# EAGLE board box (EAGLE 8.3.1)
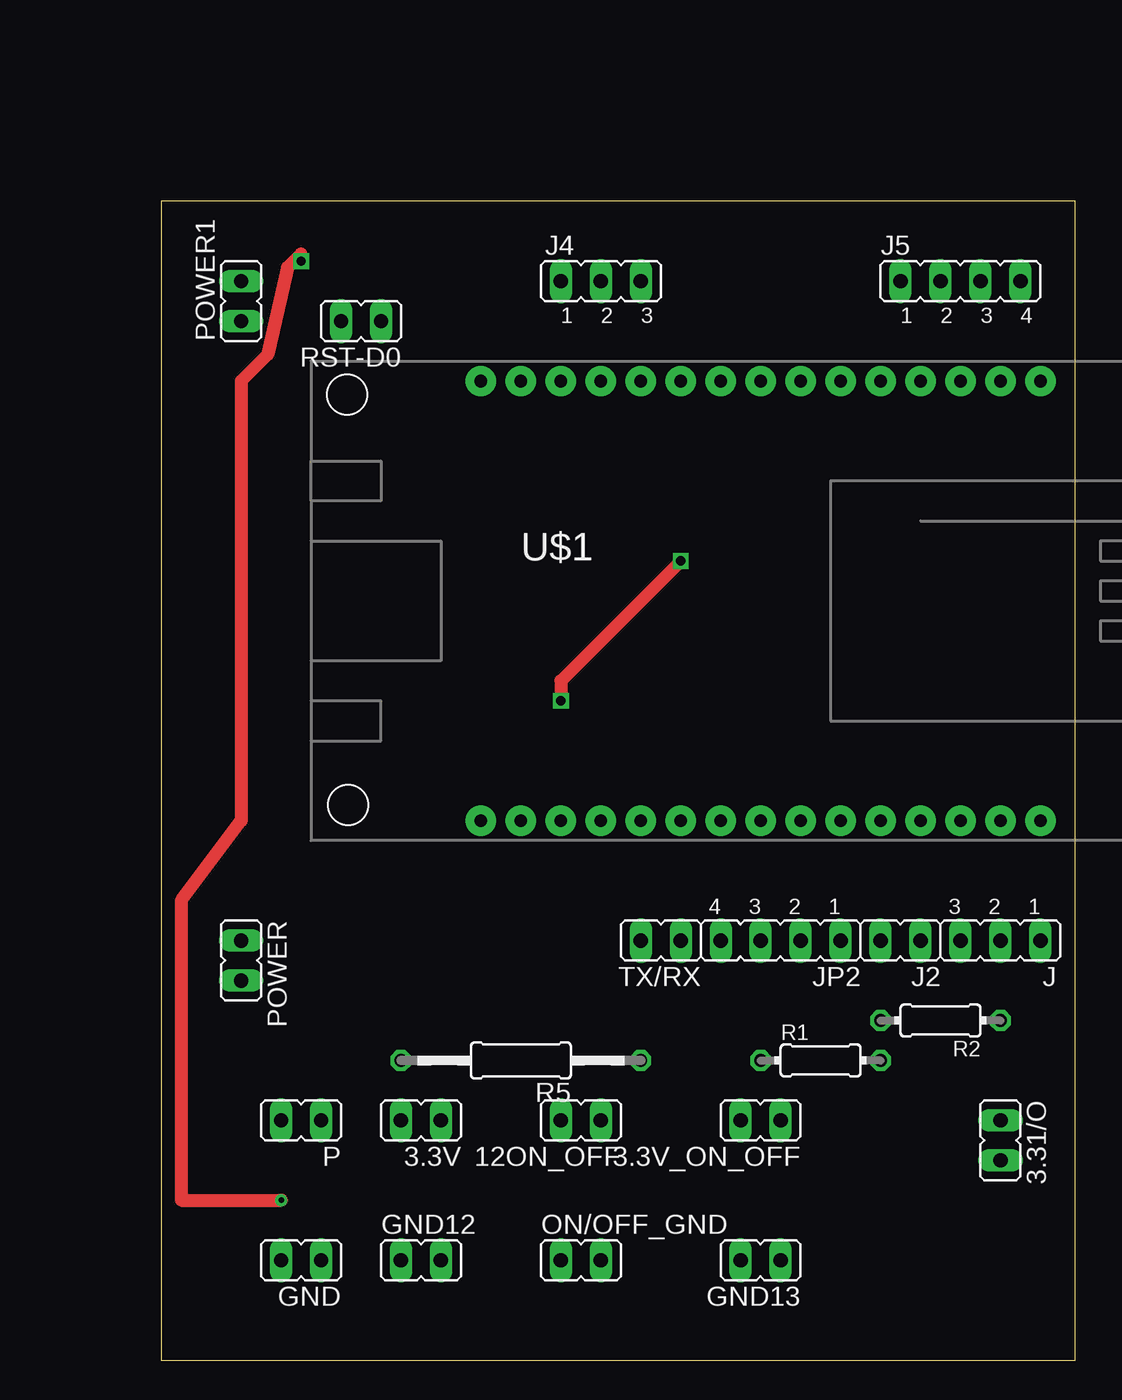
[diagram p0: board, top side]
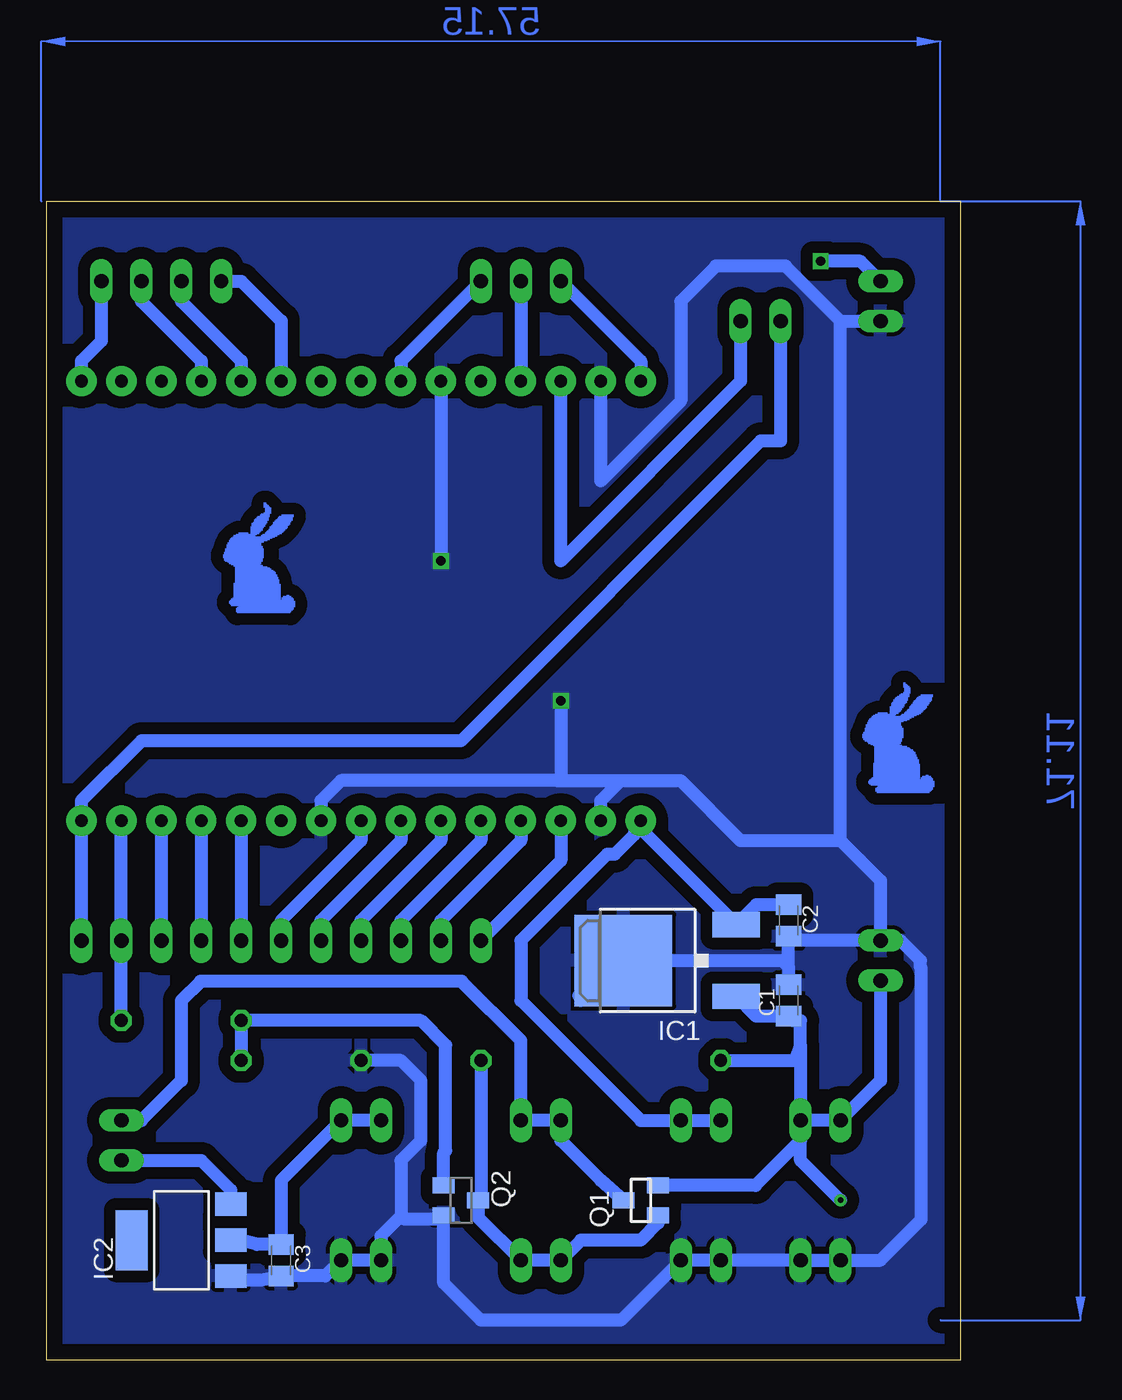
[diagram p1: board, bottom side, seen from below]

Size 58.09 x 73.65 mm. Coordinates in mm from the lower left corner, seen from the top.
Outline: 0,0 58.09,0 58.09,73.65 0,73.65 0,0
Copper layers (1*16): Top 0.035mm / dielectric 1.5mm / Bottom 0.035mm
Design rules "default *": minimum track width 6mil, minimum drill 0.35mm, track to track 30mil, track to pad 30mil, pad to pad 30mil, via to via 30mil, smd to smd 30mil, copper to edge 40mil, drill to drill 6mil, minimum pad ring 10mil, minimum via ring 8mil, stop-mask expansion 4mil, vias tented up to drill 0mil, thermal gap 10mil
Net classes: 0 default: clearance 0.205 mm

## Footprints (pad centres in the part's own frame; a part is rotated, then mirrored left to right if it is on the bottom)
JP1 = drill 0.914 long: 1 0,-1.27; 2 0,1.27
C0805K = smd 1.3 x 1.6: 1 -1,0; 2 1,0
DPACK = smd 1.6 x 3: 1 -2.28,-4.8; 3 2.28,-4.8 | smd 5.8 x 6.2: 4 0,2.38
SOT223 = smd 1.499 x 2.007: 1 -2.261,-3.15; 2 0.025,-3.15; 3 2.311,-3.15 | smd 3.81 x 2.007: 4 0,3.15
JP2 = drill 0.914 long: 1 -2.54,0; 2 0,0; 3 2.54,0
JP4 = drill 0.914 long: 1 -3.81,0; 2 -1.27,0; 3 1.27,0; 4 3.81,0
SUPER-SOT3 = smd 1 x 1.4: 1 -0.95,-1.1; 2 0.95,-1.1; 3 0,1.1
SOT23 = smd 1 x 1.4: 1 -0.95,-1.1; 2 0.95,-1.1; 3 0,1.1
0204/7 = drill 0.813 octagon: 1 -3.81,0; 2 3.81,0
0207/15 = drill 0.813 octagon: 1 -7.62,0; 2 7.62,0
ESP12_DEVKIT = drill 0.8 pad 1.93: 3V3@0 -13.97,-7.62; 3V3@1 13.97,5.08; 3V3@2 13.97,-17.78; 5V -13.97,12.7; A0 -13.97,17.78; D0 13.97,17.78; D1 13.97,15.24; D2 13.97,12.7; D3 13.97,10.16; D4 13.97,7.62; D5 13.97,0; D6 13.97,-2.54; D7 13.97,-5.08; D8 13.97,-7.62; EN -13.97,-10.16; GND@0 -13.97,-5.08; GND@1 -13.97,-15.24; GND@2 13.97,2.54; GND@3 13.97,-15.24; GND@5 -13.97,15.24; RST -13.97,-12.7; RX 13.97,-10.16; S0 -13.97,0; S1 -13.97,5.08; S2 -13.97,7.62; S3 -13.97,10.16; SC -13.97,2.54; SK -13.97,-2.54; TX 13.97,-12.7; VI -13.97,-17.78

## Placement (x,y rotation side)
3.3V  [JP1]  16.51,15.24 90 top
3.3V_ON_OFF  [JP1]  38.1,15.24 90 top
3.31/O  [JP1]  53.34,13.97 180 top
12ON_OFF  [JP1]  26.67,15.24 90 top
C1  0.1  [C0805K]  10.92,22.86 90 bottom
C2  0.1  [C0805K]  10.92,27.94 270 bottom
C3  22uF  [C0805K]  43.18,6.35 270 bottom
GND  GND  [JP1]  8.89,6.35 90 top
GND12  GND  [JP1]  16.51,6.35 270 top
GND13  GND  [JP1]  38.1,6.35 90 top
IC1  LP2950CDT-3.3  [DPACK]  19.05,25.4 90 bottom
IC2  REG1117  [SOT223]  49.53,7.62 90 bottom
J  [JP2]  53.34,26.67 180 top
J2  [JP1]  46.99,26.67 90 top
J4  [JP2]  27.94,68.58 0 top
J5  [JP4]  50.8,68.58 0 top
JP2  [JP4]  39.37,26.67 180 top
ON/OFF_GND  [JP1]  26.67,6.35 270 top
P  12V  [JP1]  8.89,15.24 90 top
POWER  12V  [JP1]  5.08,25.4 180 top
POWER1  12V  [JP1]  5.08,67.31 0 top
Q1  FDN360P  [SUPER-SOT3]  20.32,10.16 90 bottom
Q2  BSS123  [SOT23]  31.75,10.16 270 bottom
R1  10k  [0204/7]  41.91,19.05 0 top
R2  10k  [0204/7]  49.53,21.59 180 top
R5  6.4k  [0207/15]  22.86,19.05 180 top
RST-D0  [JP1]  12.7,66.04 90 top
TX/RX  [JP1]  31.75,26.67 90 top
U$1  ESP12_DEVKIT  [ESP12_DEVKIT]  38.1,48.26 270 top

## Library data of the parts
3.3V 3.3V_ON_OFF 3.31/O 12ON_OFF GND GND12 GND13 J J2 J4 J5 JP2 ON/OFF_GND P POWER POWER1 RST-D0 TX/RX = jumper
C1-C3 R1 R2 R5 = rcl
IC1 = v-reg
IC2 = burr-brown; MPN: REG1117; OC_FARNELL: 1097566; OC_NEWARK: 14P6981
Q1 = transistor-power
Q2 = transistor-small-signal
U$1 = ESP12_DEVKIT

## Nets
+5V: 3.3V.1 3.3V.2 C2.1 IC1.3 U$1.3V3@2
+12V: C1.1 IC1.1 P.1 P.2 POWER1.2 POWER.2 Q1.2 R5.2
ARD_TR: J.2 R2.1 U$1.D1
GND: C1.2 C2.2 C3.2 GND12.1 GND12.2 GND13.1 GND13.2 GND.1 GND.2 IC1.4 IC2.1 POWER1.1 POWER.1 Q2.2 R1.1 U$1.GND@0 U$1.GND@1 U$1.GND@2 U$1.GND@3
N$1: 3.3V_ON_OFF.1 3.3V_ON_OFF.2 C3.1 IC2.2
N$2: Q2.1 R1.2 R2.2
N$3: 3.31/O.1 12ON_OFF.1 12ON_OFF.2 Q1.3
N$5: RST-D0.1 U$1.RST
N$6: J.1 RST-D0.2 U$1.D0
N$7: J5.4 U$1.A0
N$8: J5.3 U$1.S3
N$9: J5.2 U$1.S2
N$10: J5.1 U$1.S1
N$11: JP2.4 U$1.D8
N$12: JP2.3 U$1.D7
N$13: JP2.2 U$1.D6
N$14: JP2.1 U$1.D5
N$15: 3.31/O.2 IC2.3
N$16: J.3 U$1.D2
N$17: J2.1 U$1.D3
N$18: J2.2 U$1.D4
N$19: TX/RX.1 U$1.RX
N$20: TX/RX.2 U$1.TX
N$23: J4.3 U$1.SK
N$24: J4.2 U$1.EN
N$25: J4.1 U$1.VI
ON/OFF_GND: ON/OFF_GND.1 ON/OFF_GND.2 Q1.1 Q2.3 R5.1

## Tracks (layer width: path | path; a pad name or v marks a point on that pad's centre or on a via)
+5V
  Bottom 0.813: C2.1 12.99,28.94 IC1.3 20.32,33.75 U$1.3V3@2 20.73,33.88 20.73,33.41 21.98,32.16 22.45,32.16 27.94,26.67 27.94,22.86 20.32,15.24 3.3V.1 3.3V.2
+12V  (via drill 0.35, 0.6)
  Top 0.813: v8.89,69.85 8.89,70.33 8.03,69.46 6.76,63.91 5.08,62.23 5.08,34.29 1.27,29.21 1.27,10.16 v7.62,10.16
  Bottom 0.813: IC1.1 12.99,21.86 C1.1 10.65,21.59 10.16,21.59 10.16,19.98 | POWER1.2 6.35,69.85 v8.89,69.85 | POWER.2 5.08,17.78 P.2 P.1 | 10.16,19.98 P.1 | R5.2 10.5,19.05 10.16,19.98 | 10.16,13.97 P.1 | 10.16,13.97 13.02,11.11 Q1.2 | v7.62,10.16 10.16,12.7 10.16,13.97
ARD_TR
  Bottom 0.813: U$1.D1 J.2 R2.1
GND  (via drill 0.6)
  Top 0.813: v33.02,50.8 25.4,43.18 v25.4,41.91
  Bottom 0.813: 24.13,25.4 22.86,26.67 | 24.13,25.4 IC1.4 11.34,25.4 10.92,24.98 | POWER.1 10.65,26.67 C2.2 10.92,24.98 | 10.92,24.98 C1.2 | U$1.GND@3 22.86,35.56 21.59,36.83 | 21.59,36.83 17.78,36.83 13.97,33.02 7.62,33.02 | 7.62,33.02 5.08,30.48 POWER.1 | 7.62,33.02 7.62,66.04 | 7.62,66.04 POWER1.1 | 25.63,36.83 21.59,36.83 | 25.63,36.83 39.37,36.83 40.64,35.56 U$1.GND@2 | 7.62,66.04 11.12,69.55 15.55,69.55 17.78,67.31 17.78,60.96 22.86,55.88 U$1.GND@1 | U$1.GND@0 v33.02,50.8 | v25.4,41.91 25.4,37.06 25.63,36.83 | 24.13,23.29 24.13,22.86 | 24.13,23.29 24.13,25.4 | 32.85,8.98 Q2.2 | 24.25,23.16 24.13,23.29 | 35.56,9.17 35.56,12.7 34.29,13.97 34.29,17.78 35.56,19.05 R1.1 | 35.56,9.17 35.55,9.17 35.36,8.98 32.85,8.98 | 42.91,5.35 C3.2 | 42.91,5.35 44.45,5.08 45.39,5.08 | 45.72,5.08 45.39,5.08 | 45.39,5.08 IC2.1 | POWER.1 3.81,26.67 2.54,25.4 2.54,24.96 2.49,24.91 2.49,8.94 5.08,6.35 GND.2 GND.1 GND12.1 GND12.2 21.59,2.54 30.48,2.54 32.85,4.91 32.85,8.98 | 35.56,9.17 36.83,7.9 GND13.2 GND13.1 40.37,5.35 42.91,5.35
  pour Bottom: 0,73.66 58.42,73.66 58.42,0 0,0
N$1
  Bottom 0.813: 3.3V_ON_OFF.2 3.3V_ON_OFF.1 43.18,11.43 C3.1 44.72,7.35 45.72,7.62 46.36,7.62 IC2.2
N$2
  Bottom 0.813: R1.2 R2.2 34.29,21.59 32.71,20.01 32.71,13.32 32.85,13.18 Q2.1
N$3
  Bottom 0.813: Q1.3 22.86,11.43 25.4,13.97 12ON_OFF.2 12ON_OFF.1 27.94,20.32 31.7,24.08 48.31,24.08 49.53,22.86 49.53,17.78 52.07,15.24 3.31/O.1
N$5
  Bottom 0.813: RST-D0.1 13.97,62.23 25.4,50.8 U$1.RST
N$6
  Bottom 0.813: J.1 U$1.D0 55.88,35.56 52.07,39.37 31.75,39.37 12.7,58.42 11.43,58.42 RST-D0.2
N$7
  Bottom 0.813: J5.4 54.61,64.77 55.88,63.5 U$1.A0
N$8
  Bottom 0.813: J5.3 52.07,67.31 48.26,63.5 U$1.S3
N$9
  Bottom 0.813: J5.2 49.53,67.31 45.72,63.5 U$1.S2
N$10
  Bottom 0.813: J5.1 45.72,68.58 43.18,66.04 U$1.S1
N$11
  Bottom 0.813: U$1.D8 30.48,33.02 35.56,27.94 JP2.4
N$12
  Bottom 0.813: U$1.D7 33.02,33.02 38.1,27.94 JP2.3
N$13
  Bottom 0.813: U$1.D6 35.56,33.02 40.64,27.94 JP2.2
N$14
  Bottom 0.813: U$1.D5 38.1,33.02 43.18,27.94 JP2.1
N$15
  Bottom 0.813: 3.31/O.2 48.26,12.7 46.38,10.82 IC2.3
N$16
  Bottom 0.813: U$1.D2 J.3
N$17
  Bottom 0.813: U$1.D3 J2.1
N$18
  Bottom 0.813: U$1.D4 J2.2
N$19
  Bottom 0.813: U$1.RX 27.94,33.02 33.02,27.94 TX/RX.1
N$20
  Bottom 0.813: U$1.TX 25.4,31.75 TX/RX.2
N$23
  Bottom 0.813: J4.3 35.56,63.5 U$1.SK
N$24
  Bottom 0.813: J4.2 U$1.EN
N$25
  Bottom 0.813: J4.1 20.32,63.5 U$1.VI
ON/OFF_GND
  Bottom 0.813: R5.1 30.48,10.33 Q2.3 30.65,9.06 ON/OFF_GND.2 ON/OFF_GND.1 24.13,7.62 20.32,7.62 19.22,8.72 Q1.1
(copper drawn outside any net)
  shapes: Bottom area x232

## Text on the board
Bottom: - | -